# Altium PCB HESSO2L.PcbDoc
Units mm, origin at the board's own origin, x right, y up, seen from the top; angles counter-clockwise.
Board outline 80 x 100 mm, 2 copper layers (Top Layer, Bottom Layer), stack 1.57 mm thick; 39 components, 26 nets, 145 pads, 35 vias.
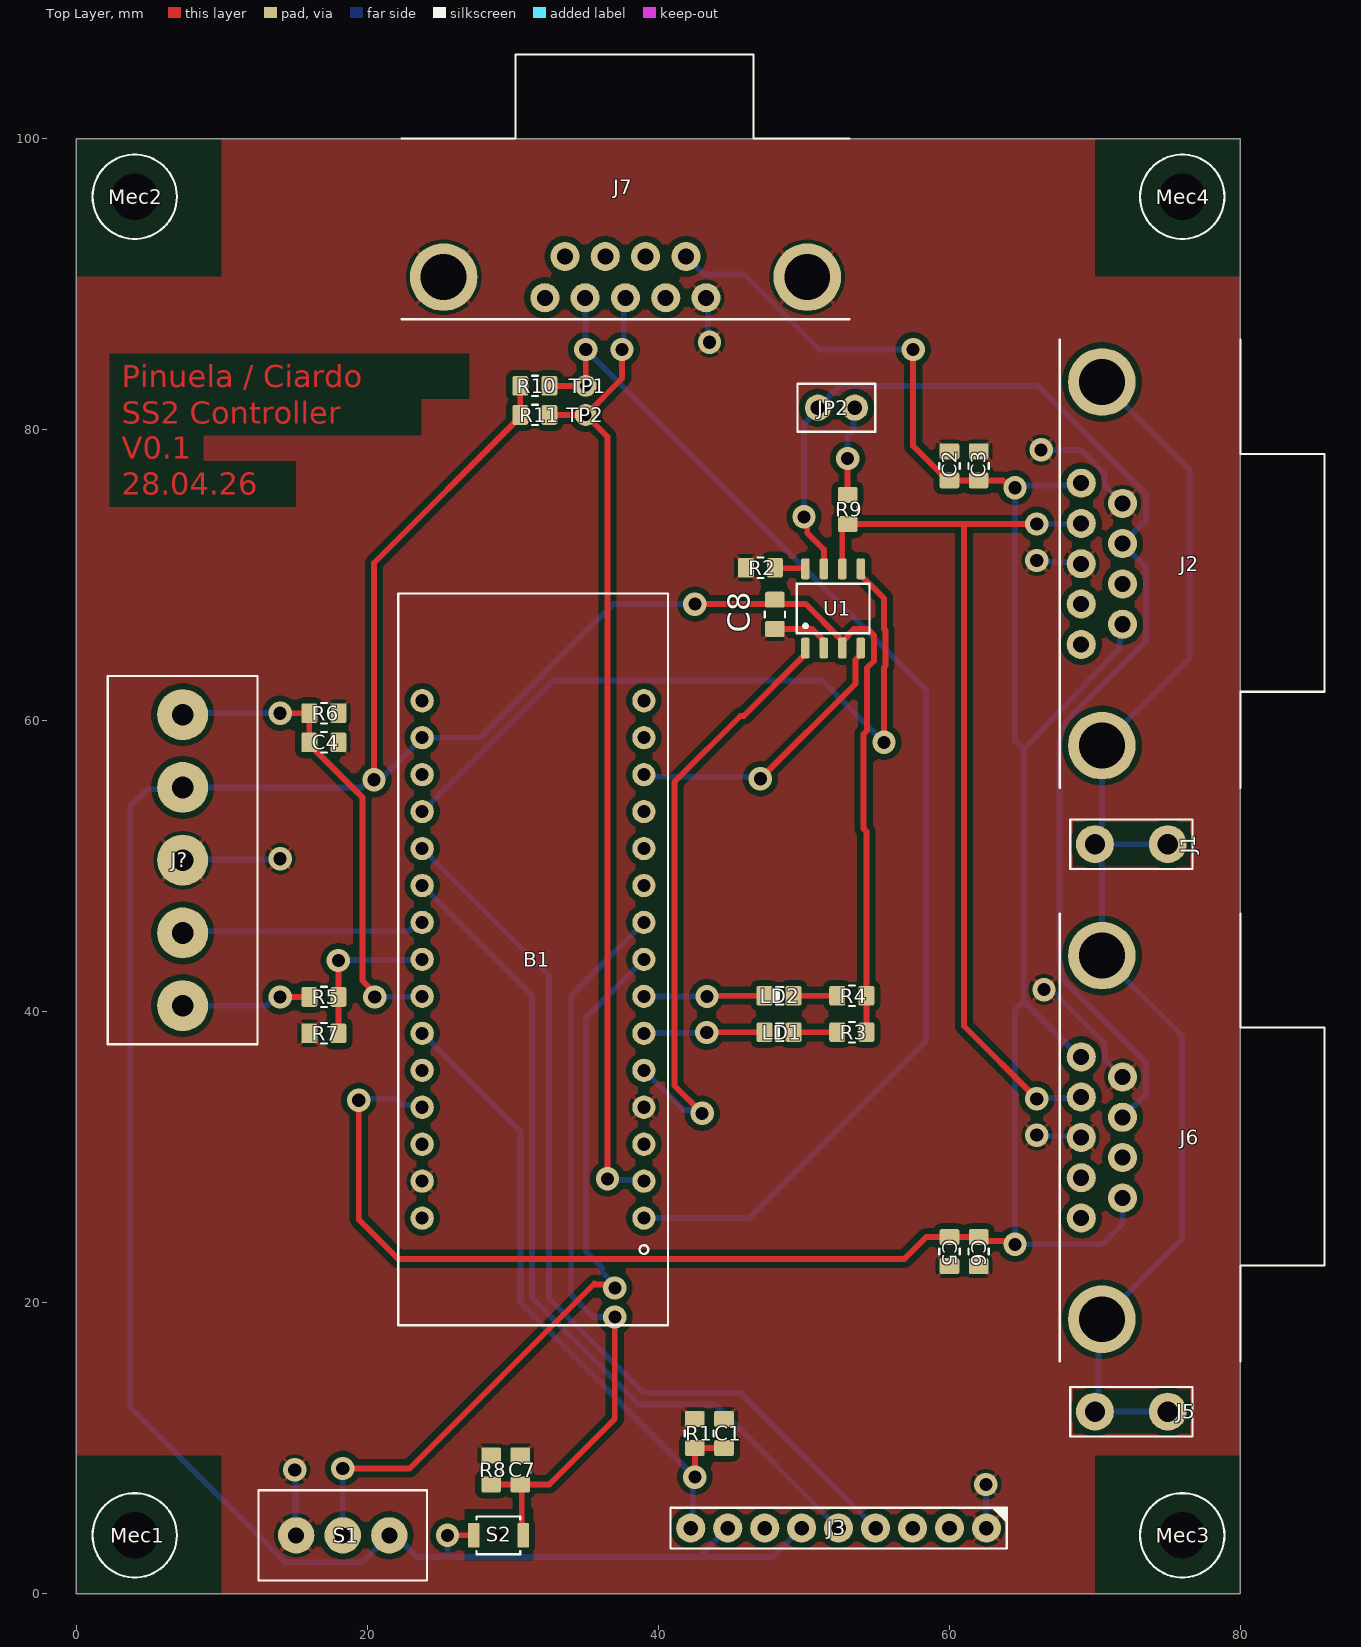
[diagram p0: Top Layer view]
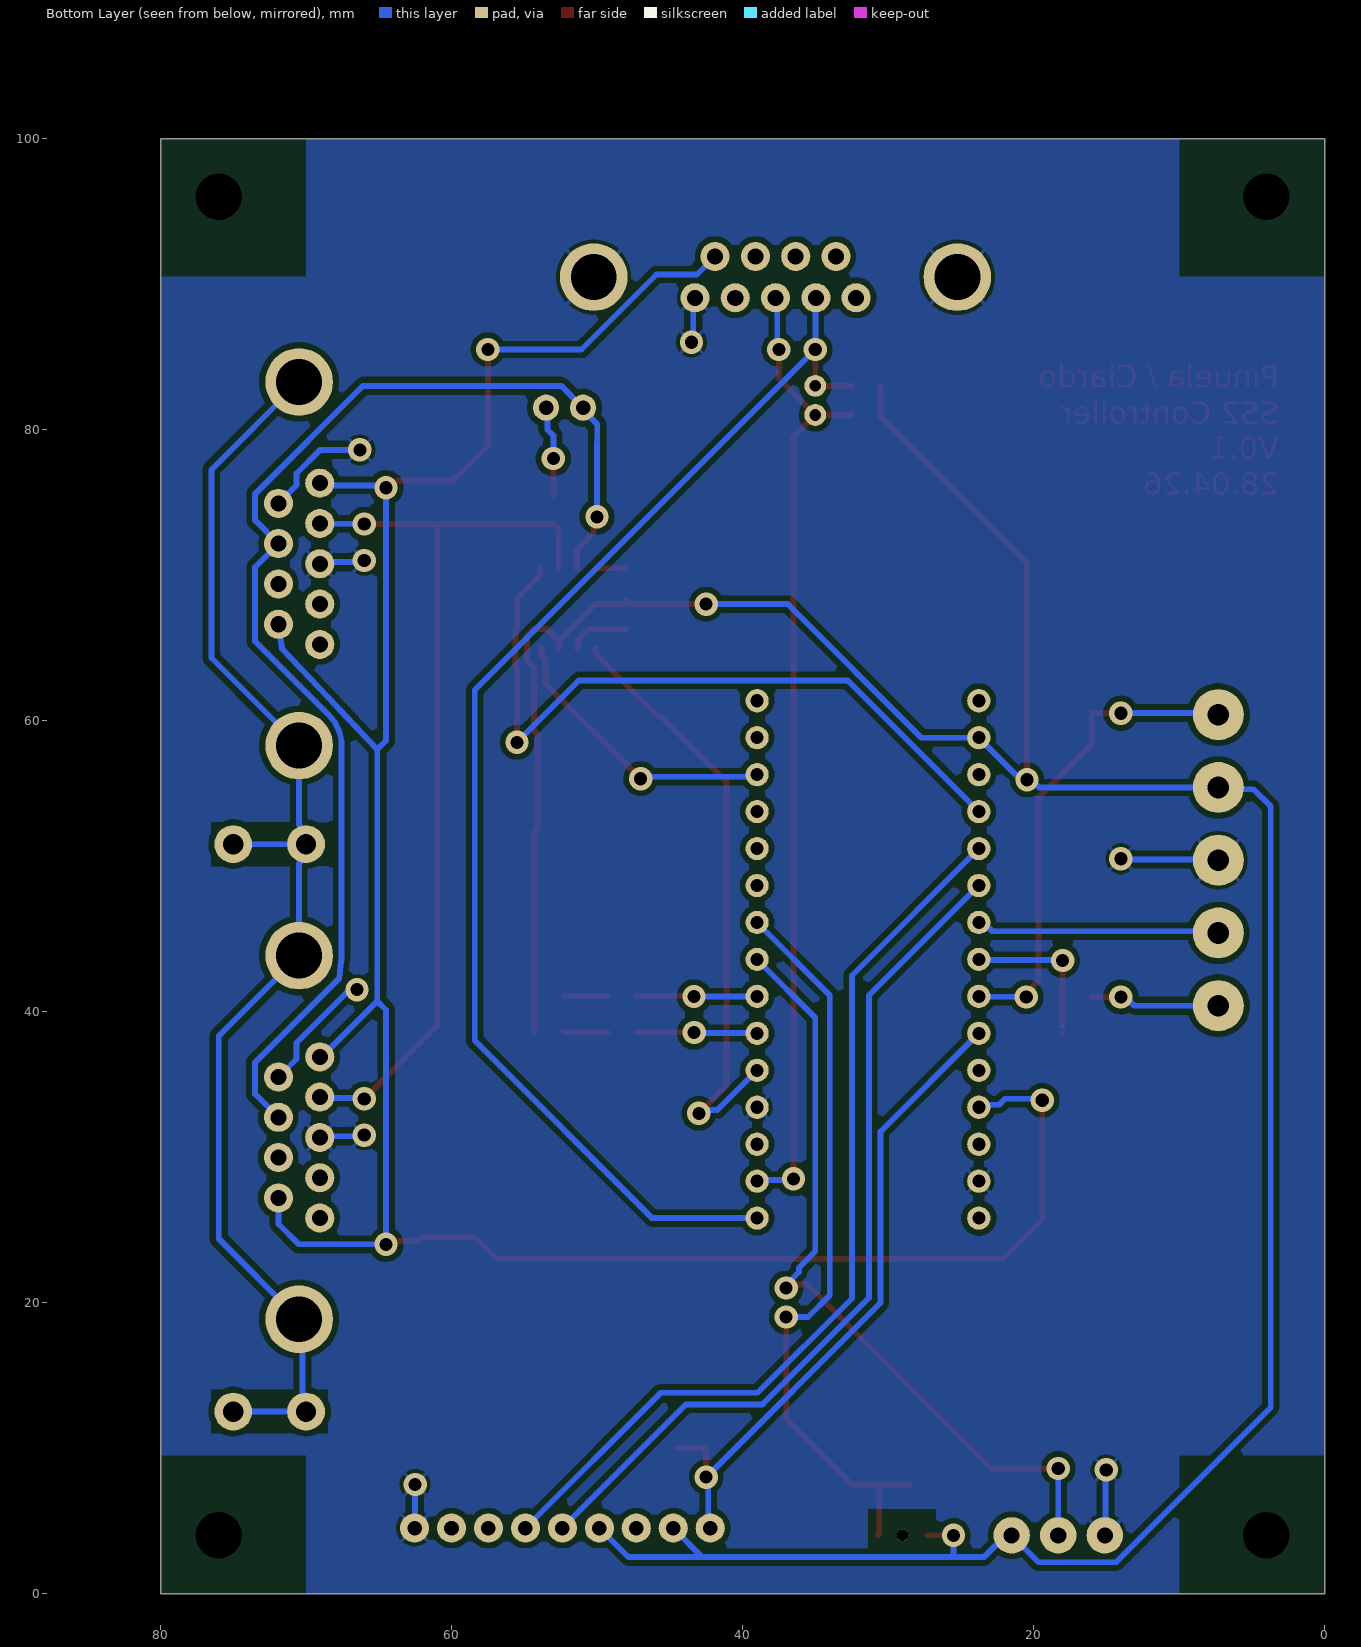
[diagram p1: Bottom Layer view, seen from below]
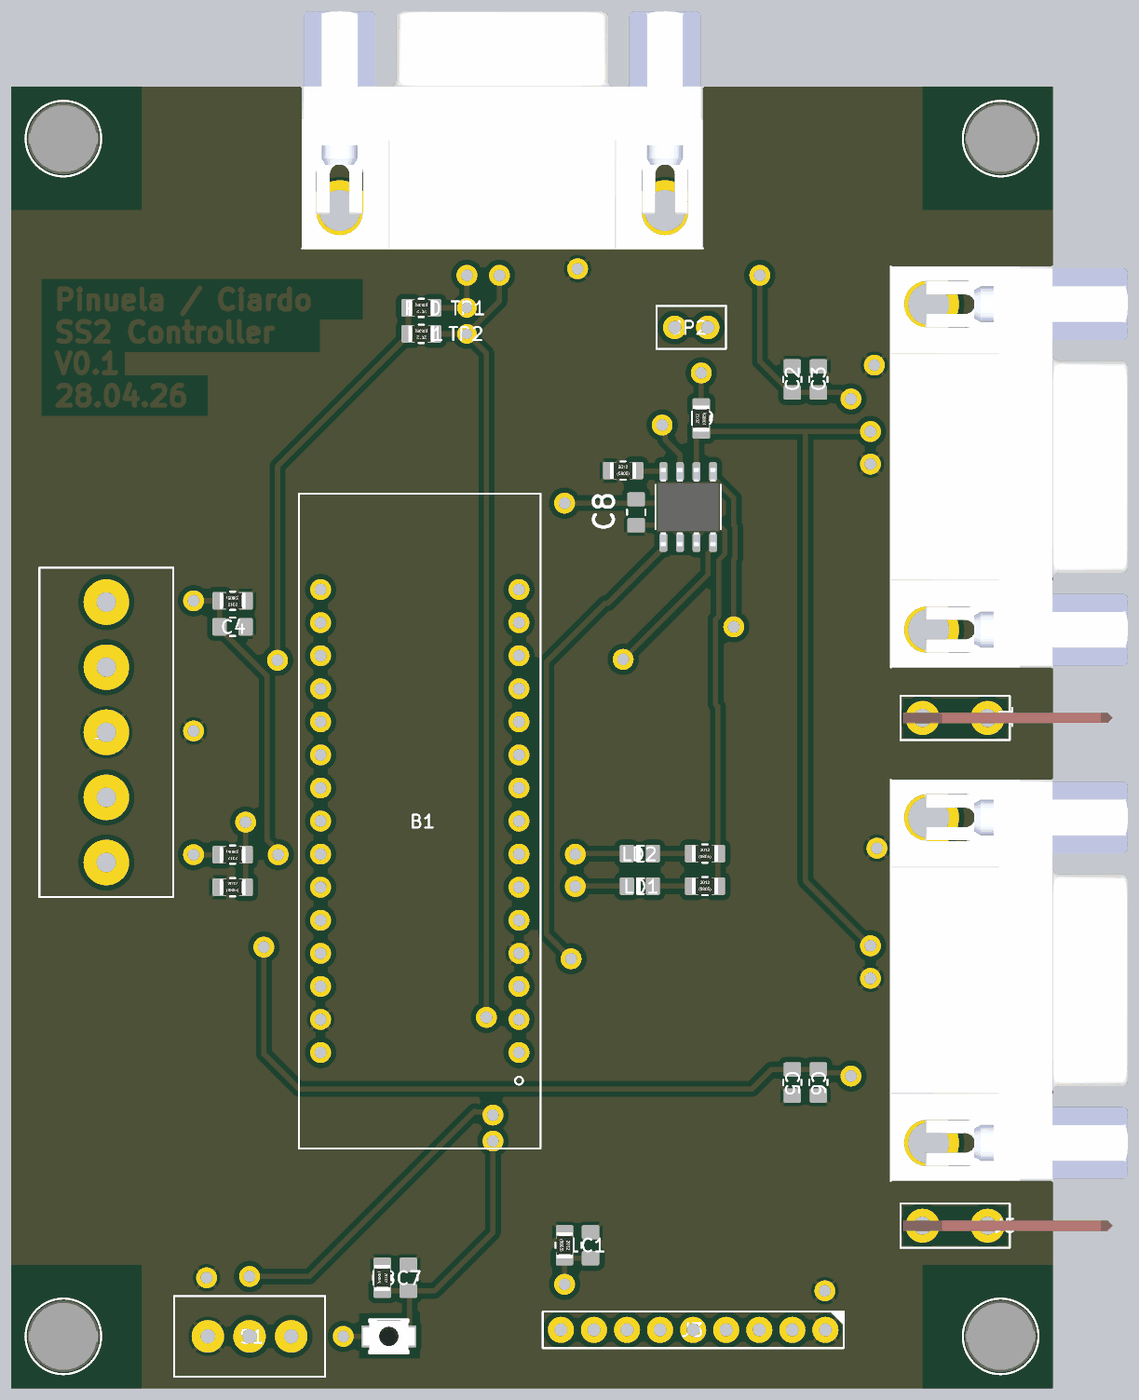
[diagram p2: 3D render of the assembled board from above, using the file's embedded part models]

## Layer stack, top to bottom
Top Layer: signal copper 0.035
Dielectric 1: core 1.5, FR-4, Dk 4.2
Bottom Layer: signal copper 0.035

## Board outline
0,0 80,0 80,100 0,100

## Design rules (kind name [scope] priority, off if disabled: settings)
AcuteAngle [All] p1 off: minimum=9.00000000000000E+0001 checktracksonly=TRUE
AssemblyTestPointUsage [All] p1 off:
AssemblyTestpoint [All] p1 off: testpointundercomponent=TRUE minsize=1.016 maxsize=2.54 preferedsize=1.524 minholesize=0 maxholesize=1.016 preferedholesize=0.813 testpointgrid=0.025 usegrid=TRUE gridtolerance=0 allowsidetop=TRUE allowsidebottom=TRUE
BoardOutlineClearance [All] p1 off: gap=0.25 ignorepadtopadclearanceinfootprint=FALSE
Clearance [All] p1: gap=0.4 ignorepadtopadclearanceinfootprint=FALSE except(0: Arc-Hole Track-Hole SMDPad-Hole THPad-Hole Via-Hole Fill-Hole Poly-Hole Region-Hole Text-Hole)
ComponentClearance [All] p1 off: gap=0.25 collisioncheckmode=3 verticalgap=0.25 showdistances=FALSE
DiffPairsRouting [All] p1 off: maxlimit=0.254 minlimit=0.254 mostfreqgap=0.254 toplayer_minwidth=0.381 toplayer_maxwidth=0.381 toplayer_prefwidth=0.381 bottomlayer_minwidth=0.381 bottomlayer_maxwidth=0.381 bottomlayer_prefwidth=0.381 maxuncoupledlength=12.7
FabricationTestPointUsage [All] p1 off: valid=0 allowmultiple=FALSE
FabricationTestpoint [All] p1 off: side=3 testpointundercomponent=TRUE minsize=1.016 maxsize=2.54 preferedsize=1.524 minholesize=0 maxholesize=1.016 preferedholesize=0.813 testpointgrid=0.025 allowsidetop=TRUE allowsidebottom=TRUE usegrid=TRUE gridtolerance=0
FanoutControl Fanout_BGA [IsBGA] p1 off: bgadir=Out bgaviamode=Centered fanoutstyle=Auto fanoutdirection=Alternating viagrid=0.025 // Fanout_BGA (Default Rule)
FanoutControl Fanout_LCC [IsLCC] p2 off: bgadir=Out bgaviamode=Centered fanoutstyle=Auto fanoutdirection=Alternating viagrid=0.025 // Fanout_LCC (Default Rule)
FanoutControl Fanout_SOIC [IsSOIC] p3 off: bgadir=Out bgaviamode=Centered fanoutstyle=Auto fanoutdirection=Alternating viagrid=0.025 // Fanout_SOIC (Default Rule)
FanoutControl Fanout_Small [(CompPinCount < 5)] p4 off: bgadir=Out bgaviamode=Centered fanoutstyle=Auto fanoutdirection=OutThenIn viagrid=0.025 // Fanout_Small (Default Rule)
FanoutControl Fanout_Default [All] p5 off: bgadir=Out bgaviamode=Centered fanoutstyle=Auto fanoutdirection=Alternating viagrid=0.025 // Fanout_Default (Default Rule)
Height [All] p1 off: minheight=0 maxheight=25.4 prefheight=12.7
HoleSize [All] p1 off: absolutevalues=TRUE maxlimit=3 minlimit=0.15 maxpercent=80.000 minpercent=20.000
HoleToHoleClearance [All] p1 off: gap=0.25 allowstackedmicrovias=TRUE
LayerPairs [All] p1 off: enforce=TRUE
MinimumAnnularRing [All] p1 off: minimumring=0.35
MinimumSolderMaskSliver [All] p1 off: minsoldermaskwidth=0
PasteMaskExpansion [All] p1 off: expansion=0
PlaneClearance [All] p1: clearance=0.25
PlaneConnect [All] p1 off: planeconnectstyle=Relief reliefexpansion=0.5 reliefentries=4 reliefconductorwidth=0.25 reliefairgap=0.25
PolygonConnect [All] p1: connectstyle=Relief reliefconductorwidth=0.25 reliefentries=4 polygonreliefangle="45 Angle" airgapwidth=0.25
RoutingCorners [All] p1 off: cornerstyle=45-Degree minsetback=2.5 maxsetback=2.5
RoutingLayers [All] p1 off: top layer_v5=TRUE bottom layer_v5=TRUE
RoutingPriority [All] p1 off: routingpriority=0
RoutingTopology [All] p1 off: topology=Shortest
RoutingVias [All] p1: holewidth=0.9 width=1.6 viastyle="Through Hole" minholewidth=0.9 minwidth=1.6 maxholewidth=1.9 maxwidth=1.6
SilkToBoardRegionClearance [All] p1 off:
SilkToSilkClearance [All] p1 off: silktosilkclearance=0
SilkToSolderMaskClearance [IsPad] p1 off: minsilkscreentomaskgap=0 clearancetoexposedcopper=TRUE
SolderMaskExpansion [All] p1 off: expansion=0 istentingtop=FALSE
Width [All] p1: maxlimit=4 minlimit=0.4 preferedwidth=0.4 minimp=50.000000 maximp=50.000000 favimp=50.000000
4 further rules are at their usual default settings.

## Components (designator, comment, footprint, x,y, rotation, side; value= is the part's Value field where it differs from the comment)
B1 "NUCLEO-L432KC Socket" "NUCLEO-L432KC Socket" 39,61.36 r180 top
C1 "10nF" "CAPACITOR 2012 REFLOW" 44.5,11 r270 top
C2 "10uF" "CAPACITOR 2012 REFLOW" 60,77.5 r270 top
C3 "100nF" "CAPACITOR 2012 REFLOW" 62,77.5 r270 top
C4 "10nF" "CAPACITOR 2012 REFLOW" 17,58.5 r180 top
C5 "10uF" "CAPACITOR 2012 REFLOW" 60,23.5 r90 top
C6 "100nF" "CAPACITOR 2012 REFLOW" 62,23.5 r90 top
C7 "10nF" "CAPACITOR 2012 REFLOW" 30.5,8.5 r270 top
C8 "100nF" "CAPACITOR 2012 REFLOW" 48,67.3 r90 top
J1 "3867B.68" "FASTON 6.3mm P5.0" 72.5,51.5 r180 top
J2 "*" "D-SUB 9 FEM RND 205-00769" 70.475,70.771 r0 top
J3 "*" "PinHeader1x9 P2.54" 52.38,4.5 r180 top
J5 "3867B.68" "FASTON 6.3mm P5.0" 72.5,12.5 r180 top
J6 "*" "D-SUB 9 FEM RND 205-00769" 70.475,31.345 r0 top
J7 "*" "D-SUB 9 FEM RND 205-00769" 37.729,90.475 r90 top
J? "*" "ScrewHeader5 P5.0" 7.3,50.4 r270 top
JP2 "{Value}" "JUMPER2 TH" 52.23,81.5 r180 top
LD1 "*" "LED 2012 REFLOW" 48.285,38.58 r0 top
LD2 "*" "LED 2012 REFLOW" 48.285,41.08 r0 top
Mec1 "*" "Screw M3X5 Unconnected" 4,4 r0 top
Mec2 "*" "Screw M3X5 Unconnected" 4,96 r0 top
Mec3 "*" "Screw M3X5 Unconnected" 76,4 r0 top
Mec4 "*" "Screw M3X5 Unconnected" 76,96 r0 top
R1 "100k" "RESISTOR 2012 REFLOW" 42.5,11 r270 top
R2 "TBD" "RESISTOR 2012 REFLOW" 47,70.5 r0 top
R3 "270" "RESISTOR 2012 REFLOW" 53.285,38.58 r0 top
R4 "270" "RESISTOR 2012 REFLOW" 53.285,41.08 r0 top
R5 "0" "RESISTOR 2012 REFLOW" 17,41 r180 top
R6 "100k" "RESISTOR 2012 REFLOW" 17,60.5 r180 top
R7 "NC" "RESISTOR 2012 REFLOW" 17,38.5 r0 top
R8 "100k" "RESISTOR 2012 REFLOW" 28.5,8.5 r270 top
R9 "120" "RESISTOR 2012 REFLOW" 53,74.5 r90 top
R10 "10k" "RESISTOR 2012 REFLOW" 31.5,83 r180 top
R11 "10k" "RESISTOR 2012 REFLOW" 31.5,81 r180 top
S1 "*" "SLIDE SWITCH Knitter MFP120" 18.3,4 r180 top
S2 "*" "Push Button C2.5X3.0 OMRON B3U-1000P(M)-B" 29,4 r0 top
TP1 "*" "Hole 0.8 D1.5" 35,83 r90 top
TP2 "*" "Hole 0.8 D1.5" 35,81 r180 top
U1 "MAX3051ESA" "SO8 P1.27 C4.0X5.0 H1.75" 52,67.7 r90 top

## Footprints (in the part's own frame and the unit in brackets; to place one, negate y for a bottom-side part, rotate by r counter-clockwise, add the part's x,y. Pads: shape width x height; smd on the part's side, far side on the other; paste and mask are expansions set on the pad)
"CAPACITOR 2012 REFLOW" [mm] "Capacitor SMD 2.0x1.2mm (0805-imperial)"
  rrect25% 1.1x1.35 smd: 1(-1,0) 2(1,0)
  silkscreen extent -0.2,-0.7 0.2,0.7, body extent -1,-0.6 1,0.6, height 1
"D-SUB 9 FEM RND 205-00769" [mm] "RND 205-00769"
  round 2 hole 1.1: 1(-1.42,5.54) 2(-1.42,2.77) 3(-1.42,0) 4(-1.42,-2.77) 5(-1.42,-5.54) 6(1.42,4.155) 7(1.42,1.385) 8(1.42,-1.385) 9(1.42,-4.155)
  round 4.65 hole 3.15: 10(0,12.495) 11(0,-12.495)
  silkscreen extent -2.9,-15.4 15.3,15.4, body extent -2.9,-15.39 15.3,15.41, height 12.69
"FASTON 6.3mm P5.0" [mm] "Faston Vogt 3867B.68 6.3mm P5.0"
  round 2.6 hole 1.4: 1(-2.5,0) 1(2.5,0)
  silkscreen extent -4.2,-1.7 4.2,1.7, body extent -12.1,-0.4 4,0.4, height 9
"Hole 0.8 D1.5" [mm] "Test Point Hole 0.8 Pad diameter 1.5"
  round 1.5 hole 0.8: 1(0,0)
"JUMPER2 TH" [mm] "JUMPER2 TH"
  round 1.8 hole 1 paste-2539.97: 1(-1.27,0) 2(1.27,0)
  silkscreen extent -2.67,-1.65 2.67,1.65, body extent -2.61,-1.6 2.61,1.6, height 8.5
"LED 2012 REFLOW" [mm] "LED SMD 2.0x1.2mm (0805-imperial)"
  rrect25% 1.1x1.35 smd: 1(-1,0) 2(1,0)
  silkscreen extent -0.2,-0.6 0.3,0.6, body extent -1,-0.6 1,0.6, height 0.6
"NUCLEO-L432KC Socket" [mm] "ARM Cortex based board"
  round 1.6 hole 0.9: 1(0,35.56) 2(0,33.02) 3(0,30.48) 4(0,27.94) 5(0,25.4) 6(0,22.86) 7(0,20.32) 8(0,17.78) 9(0,15.24) 10(0,12.7) 11(0,10.16) 12(0,7.62) 13(0,5.08) 14(0,2.54) 15(0,0) 16(15.24,0) 17(15.24,2.54) 18(15.24,5.08) 19(15.24,7.62) 20(15.24,10.16) 21(15.24,12.7) 22(15.24,15.24) 23(15.24,17.78) 24(15.24,20.32) 25(15.24,22.86) 26(15.24,25.4) 27(15.24,27.94) 28(15.24,30.48) 29(15.24,33.02) 30(15.24,35.56)
  silkscreen extent -1.65,-7.37 16.89,42.93, body extent -1.27,-1.27 16.51,36.83, height 7.01
"PinHeader1x9 P2.54" [mm] "Plug connector"
  round 2 hole 1: 1(-10.16,0) 2(-7.62,0) 3(-5.08,0) 4(-2.54,0) 5(0,0) 6(2.54,0) 7(5.08,0) 8(7.62,0) 9(10.16,0)
  silkscreen extent -11.56,-1.4 11.56,1.4, body extent -11.43,-1.27 11.43,1.27, height 8.5
"Push Button C2.5X3.0 OMRON B3U-1000P(M)-B" [mm] "Push Button C2.5X3.0 OMRON B3U-1000P(M)-B"
  rrect25% 0.8x1.7 smd: 1(-1.7,0) 2(1.7,0)
  round 0.8 hole 0.8 unplated: ""(0,0)
  silkscreen extent -1.5,-1.3 1.5,1.3, body extent -2,-1.25 2,1.25, height 1.61
"RESISTOR 2012 REFLOW" [mm] "Resistor SMD 2.0x1.2mm (0805-imperial)"
  rrect25% 1.1x1.35 smd: 1(-1,0) 2(1,0)
  silkscreen extent -0.2,-0.7 0.2,0.7, body extent -1,-0.63 1,0.63, height 0.45
"Screw M3X5 Unconnected" [mm] "Standard Screw M3X5 Unconnected BN330"
  round 0 hole 3.2 paste-2539.97 mask+0: 0(0,0)
  silkscreen extent -2.9,-2.9 2.9,2.9, body extent -2.75,-2.75 2.75,2.75, height 2.02
"ScrewHeader5 P5.0" [mm] "PCB terminal block with screw"
  round 3.5 hole 1.5: 1(-10,0) 2(-5,0) 3(0,0) 4(5,0) 5(10,0)
  silkscreen extent -12.65,-5.15 12.65,5.15, body extent -12.58,-5.1 12.5,5.07, height 14.1
"SLIDE SWITCH Knitter MFP120" [mm] "Slide Switch Knitter-Switch type MFP120"
  round 2.5 hole 1.1: 1(-3.2,0) 2(0,0) 3(3.2,0)
  silkscreen extent -5.8,-3.1 5.8,3.1, body extent -5.5,-2.8 5.5,2.8, height 10
"SO8 P1.27 C4.0X5.0 H1.75" [mm] "8-Pin Small Outline Integrated Circuit 1.27 mm Pitch, IPC Medium Density"
  rrect50% 1.45x0.6 smd: 1(-2.725,1.905) 2(-2.725,0.635) 3(-2.725,-0.635) 4(-2.725,-1.905) 5(2.725,-1.905) 6(2.725,-0.635) 7(2.725,0.635) 8(2.725,1.905)
  silkscreen extent -1.7,-2.5 1.7,2.5, body extent -3,-2.45 3,2.45, height 1.75

## Part data
B1: "ARM Cortex based board"
C1 C2 C3 C4 C5 C6 C7 C8: library part Capacitor, "Capacitor"
J1 J5: library part "FASTON 6.3mm P5.0", "Faston Right angle Vogt 3867B.68"
J2 J6 J7: library part "D-SUB 9 FEM GROUNDED", "D-Subminiature 9 way Socket Right Angle"
J3: library part PinHeader1x9, "Plug connector"
J?: library part Header5, "PCB terminal block"
JP2: library part "JUMPER 2 POS", "JUMPER 2 POS"
LD1 LD2: library part LED, "LED generic"
Mec1 Mec2 Mec3 Mec4: library part "Screw Unconnected", "Screw Unconnected BN330"
R1 R2 R3 R4 R5 R6 R7 R8 R9 R10 R11: library part Resistor, "Resistor"
S1: library part "Slide Switch 1Pole ON-ON", "Slide Switch 1Pole ON-ON"
S2: library part "Push Button 2Pins", "Push Button, 2 pins"
TP1 TP2: library part Hole, "Hole"
U1: "+3.3V, 1Mbps, Low-Supply-Current CAN Transceiver"

## Via types
v1: diameter 1.6, hole 0.9, Top Layer to Bottom Layer, 35 vias

## Nets (pads, with @x,y where several pads share a name; then routed paths per layer and width w, separated by ;. In a path a pad name is that pad's centre, name@x,y a point inside that pad or via, vN(x,y) a via of type N, cw(c..) or ccw(c..) an arc to the next point about the centre after c; other vN are vias at no path point)
+3V3: B1.17 C8.2 J3.6 J3.8 J?.2 R3.2 R4.2 R10.2 R11.2 S1.1 S2.1 U1.3 | length 218.8
  Top Layer w0.4: v1(20.449,55.93) 20.449,70.824 30.5,80.875 R11.2 R10.2 ; v1(25.5,4) S2.1 ; v1(42.5,68) 47.7,68 C8.2 ; C8.2@48,68 50.126,68 52.535,65.591 U1.3@52.535,65.4 ; U1.3 52.635,65.4 53.005,65.77 53.005,65.861 53.444,66.3 54.366,66.3 54.805,65.861 54.805,64.089 54.335,63.619 54.335,59.315 54.1,59.08 54.1,52.563 54.285,52.377 R4.2 R3.2
  Bottom Layer w0.4: v1(25.5,4) 25.5,2.5 ; v1(42.5,68) 36.889,68 27.709,58.82 B1.17 20.461,55.521 20.461,55.917 v1(20.449,55.93) 20.144,55.93 19.614,55.4 J?.2 7.179,55.279 4.879,55.279 3.7,54.1 3.7,12.784 14.334,2.15 19.65,2.15 S1.1 21.916,4 23.416,2.5 25.5,2.5 ; J3.8 42.76,2.5 ; J3.6 47.84,2.5 42.76,2.5 ; 25.5,2.5 42.76,2.5
+5: B1.27 C2.2 C3.2 C5.2 C6.2 J2.1 J2.9 J6.1 J6.9 J7.9 | length 177.2
  Top Layer w0.4: v1@19.35,33.85 v1(19.4,33.9) 19.4,25.7 22.1,23 56.9,23 58.4,24.5 C5.2 C6.2 62.27,24.23 64.27,24.23 v1(64.5,24) ; v1(57.5,85.5) 57.5,78.875 59.875,76.5 C2.2 C3.2 63.675,76.5 64.175,76 v1(64.5,76) ; J2.1@68.622,76.311 J2.1
  Bottom Layer w0.4: v1(19.4,33.9) 19.5,34 21.955,34 22.36,33.595 23.585,33.595 B1.27 ; J7.9 43.124,90.655 45.907,90.655 51.062,85.5 v1(57.5,85.5) ; J6.1 68.925,36.885 65.1,40.71 ; J2.1 68.899,76.155 64.655,76.155 v1(64.5,76) 64.5,58.617 65.1,58.017 ; J6.9 71.895,25.395 70.5,24 v1(64.5,24) 64.5,40.11 65.1,40.71 ; J2.9 71.653,64.931 67.861,60.93 67.858,60.927 ccw(c70.475,58.276) 67.685,60.744 65.1,58.017 ; 65.1,40.71 65.1,40.92 65.1,58.017
C_AXEX: B1.21 J3.5 | length 59.1
  Bottom Layer w0.4: B1.21 31.316,41.104 31.316,20.316 38.631,13 43.88,13 J3.5
C_AXEY: B1.20 J3.4 | length 63.5
  Bottom Layer w0.4: B1.20 32.481,42.479 32.481,20.281 38.963,13.8 45.62,13.8 J3.4
C_CAN1_RX: B1.13 U1.4 | length 20
  Top Layer w0.4: v1(47,56) 53.535,62.535 53.535,64.18 53.805,64.45 53.805,64.875 U1.4
  Bottom Layer w0.4: B1.13 39.14,56.14 46.86,56.14 v1(47,56)
C_CAN1_TX: B1.5 U1.1 | length 41.8
  Top Layer w0.4: v1(43,33) 41.1,34.9 41.1,55.783 45.633,60.317 45.862,60.317 50.095,64.55 U1.1
  Bottom Layer w0.4: B1.5 41.73,33.23 42.77,33.23 v1(43,33)
C_DAC1: B1.22 J?.4 | length 16.7
  Bottom Layer w0.4: J?.4@7.3,45.521 22.836,45.521 23.435,46.12 B1.22
C_External_Analog_Input: B1.23 R5.1 R7.2 | length 10.3
  Top Layer w0.4: R7.2@18,39 R5.1 v1(18,43.5)
  Bottom Layer w0.4: v1(18,43.5) 18.04,43.54 23.72,43.54 B1.23
CANH: J2.7 J6.7 JP2.2 U1.7 | length 87.9
  Top Layer w0.4: v1(50,74) 50.23,73.77 50.23,72.885 51.365,71.75 U1.7
  Bottom Layer w0.4: v1(50,74) 49.992,74.008 49.992,79.099 49.984,79.107 49.984,80.355 50.96,81.331 JP2.2 52.46,83 66.084,83 73.495,75.589 73.495,73.756 J2.7 73.495,70.556 73.495,65.433 68.424,60.361 cw(c67.858,60.927) 68.422,60.359 ccw(c70.475,58.276) 67.55,58.276 67.55,43.84 ccw(c70.475,43.84) 67.639,43.126 67.709,42.291 67.813,42.187 73.495,36.505 73.495,34.33 J6.7
CANL: J2.2 J6.2 R9.1 U1.6 | length 64
  Top Layer w0.4: U1.6 52.635,73.15 52.985,73.5 R9.1 61,73.5 ; v1(66,34) 61,39 61,73.5 ; v1(66,73.5) 61,73.5
  Bottom Layer w0.4: v1(66,34) 66.058,34.058 68.997,34.058 J6.2 ; v1(66,73.5) 66.02,73.52 69.034,73.52 J2.2
EARTH: J1.1 J2.10 J2.11 J5.1 J6.10 J6.11 | length 90.9
  Bottom Layer w0.4: J2.10 76.5,77.241 76.5,64.301 J2.11 70.475,52.834 70.421,52.78 70.421,51.921 J1.1@70,51.5 ; J5.1@75,12.5 70,12.5 70.237,12.737 70.237,18.613 J6.11 76,24.375 76,38.315 J6.10 70.475,50.166 70.421,50.22 70.421,51.079 J1.1@70,51.5 ; J1.1@75,51.5 J1.1@70,51.5
EXTERNAL_BUTTON: B1.24 C4.2 J?.1 R6.2 | length 33.9
  Top Layer w0.4: v1(14,60.5) R6.2 C4.2 16,58.375 19.649,54.726 19.649,42.129 20.5,41.277 v1(20.5,41)
  Bottom Layer w0.4: J?.1@6.724,60.521 7.3,60.521 7.311,60.511 13.989,60.511 v1(14,60.5) ; v1(20.5,41) 20.52,41.02 23.74,41.02 B1.24
GND: B1.4 B1.29 C1.1 C2.1 C3.1 C4.1 C5.1 C6.1 C7.1 C8.1 J2.3 J2.6 J3.1 J6.3 J6.6 J7.5 J7.10 J7.11 J?.3 R1.1 R2.1 R6.1 R7.1 R8.1 S1.3 U1.2 | length 44.1
  Top Layer w0.4: C8.1 50.556,66.3 51.265,65.591 51.265,65.075 U1.2
  Bottom Layer w0.4: J?.3 7.35,50.45 13.95,50.45 v1(14,50.5) ; v1(15,8.5) 15.05,8.45 15.05,4.05 S1.3 ; J7.5 43.384,88.939 43.384,86.116 v1(43.5,86) ; v1(62.5,7.5) 62.52,7.48 62.52,4.52 J3.1 ; v1(66,31.5) 66.078,31.423 68.977,31.423 J6.3 ; v1(66,71) 66.115,70.885 68.94,70.885 J2.3 ; v1(66.3,78.6) 69.029,78.6 70.655,76.974 70.655,76.166 J2.6 ; v1(66.5,41.5) 66.73,41.27 67.23,41.27 70.655,37.845 70.655,36.74 J6.6
Joystick_Button: B1.25 C1.2 J3.9 R1.2 | length 46.1
  Top Layer w0.4: J3.9 J3.9@42.36,4.64 ; v1(42.5,8) R1.2 C1.2
  Bottom Layer w0.4: B1.25 30.516,31.744 30.516,19.984 v1(42.5,8) 42.36,7.86 42.36,4.64 J3.9
LED1: B1.6 LD1.1 | length 8.3
  Top Layer w0.4: B1.6 B1.6@39.013,38.513 ; v1(43.32,38.556) 43.345,38.58 LD1.1
  Bottom Layer w0.4: B1.6 39.028,38.528 43.293,38.528 v1(43.32,38.556)
LED2: B1.7 LD2.1 | length 8.3
  Top Layer w0.4: B1.7 B1.7@39.007,41.033 ; v1(43.327,41.031) 43.377,41.08 LD2.1
  Bottom Layer w0.4: B1.7 39.005,41.035 43.323,41.035 v1(43.327,41.031)
NetJ?_5: J?.5 R5.2 | length 8.9
  Top Layer w0.4: v1(14,41) R5.2
  Bottom Layer w0.4: J?.5 13.075,40.4 13.675,41 v1(14,41)
NetJP2_1: JP2.1 R9.2 | length 6.2
  Top Layer w0.4: R9.2 v1(53,78)
  Bottom Layer w0.4: v1(53,78) 53,79.588 53.412,80 53.412,81.412 JP2.1
NetLD1_2: LD1.2 R3.1 | length 3
  Top Layer w0.4: LD1.2 R3.1 R3.1@52.273,38.593
NetLD2_2: LD2.2 R4.1 | length 3
  Top Layer w0.4: LD2.2 R4.1
NetR2_2: R2.2 U1.8 | length 2.1
  Top Layer w0.4: R2.2 48.038,70.462 50.058,70.462 U1.8
PUSHBUTTON: B1.9 C7.2 R8.2 S2.2 | length 52.3
  Top Layer w0.4: R8.2 C7.2 ; S2.2 30.6,4.1 30.6,7.4 C7.2 ; v1(37,19) 37,12 32.5,7.5 C7.2
  Bottom Layer w0.4: v1(37,19) 35.5,19 34,20.5 34,41.12 B1.9
SCL: B1.1 J7.2 R10.1 TP1.1 | length 90.2
  Top Layer w0.4: R10.1 TP1.1 v1(35,85.5)
  Bottom Layer w0.4: J7.2 34.98,89.034 34.98,85.52 v1(35,85.5) 58.4,62.1 58.4,38 46.2,25.8 B1.1
SDA: B1.2 J7.3 R11.1 TP2.1 | length 67.4
  Top Layer w0.4: R11.1 TP2.1 ; v1(36.5,28.5) 36.5,79.5 TP2.1 ; v1(37.5,85.5) 37.5,83.5 TP2.1
  Bottom Layer w0.4: v1(36.5,28.5) 36.58,28.42 38.92,28.42 B1.2 ; v1(37.5,85.5) 37.615,85.614 37.615,88.94 J7.3
SHDN_MAX3051: B1.19 U1.5 | length 49.9
  Top Layer w0.4: U1.5 53.905,70 55.5,68.405 55.5,66.297 55.605,66.192 55.605,63.758 55.5,63.653 v1(55.5,58.5)
  Bottom Layer w0.4: B1.19 32.78,62.76 51.24,62.76 v1(55.5,58.5)
SLIDER: B1.8 S1.2 | length 53.8
  Top Layer w0.4: v1(18.3,8.6) 22.9,8.6 35.6,21.3 35.67,21.23 36.77,21.23 v1(37,21)
  Bottom Layer w0.4: S1.2 v1(18.3,8.6) ; v1(37,21) 37,21.217 36.119,22.099 36.119,22.381 35,23.5 35,39.58 B1.8
pads on no net: B1.3 B1.10 B1.11 B1.12 B1.14 B1.15 B1.16 B1.18 B1.26 B1.28 B1.30 J2.4 J2.5 J2.8 J3.2 J3.3 J3.7 J6.4 J6.5 J6.8 J7.1 J7.4 J7.6 J7.7 J7.8 Mec1.0 Mec2.0 Mec3.0 Mec4.0 S2.

## Polygon pours and split planes (outlines as drawn)
GND on Top Layer "GND_L01_P001" (solid, pour order 1): 0,100 80,100 80,0 0,0
GND on Bottom Layer "GND_L02_P000" (solid, pour order 0): 0,100 80,100 80,0 0,0

## Other copper
Top Layer:
  text "Pinuela / Ciardo" at 3.1,82.9 h1.52
  text "SS2 Controller" at 3.1,80.4 h1.52
  text "V0.1" at 3.1,78 h1.52
  text "28.04.26" at 3.1,75.5 h1.52
Multi-Layer:
  pour cut-out: 68.5,53 76.5,53 76.5,50 68.5,50
  pour cut-out: 26.7,5.777 31.4,5.82 31.4,2.3 26.7,2.3
  pour cut-out: 0,9.5 10,9.5 10,0 0,0
  pour cut-out: 70,9.5 80,9.5 80,0 70,0
  pour cut-out: 68.5,14 76.5,14 76.5,11 68.5,11
  pour cut-out: 0,100 10,100 10,90.5 0,90.5
  pour cut-out: 70,100 80,100 80,90.5 70,90.5
  pour cut-out: 67,-90.5 77,-90.5 77,-100 67,-100

## Silkscreen, mask and mechanical layers (free items; w line width, h text height)
Mechanical 1:
  the board outline again, w0.15
Drill Drawing:
  circle w0.254: c2.256,117.1 r0.847
  lines w0.254: 1.409,112.867 1.833,112.867 1.833,112.443 2.679,112.443 2.679,112.867 3.103,112.867 3.103,113.713 2.679,113.713 2.679,114.137 1.833,114.137 1.833,113.713 1.409,113.713 1.409,112.867 ; 1.409,120.487 1.833,120.487 2.256,120.063 2.679,120.487 3.103,120.487 2.679,120.91 3.103,121.333 2.679,121.333 2.256,121.757 1.833,121.333 1.409,121.333 1.833,120.91 1.409,120.487 ; 1.409,125.567 3.103,125.567 2.256,123.873 1.409,125.567 ; 1.409,127.683 2.256,128.107 3.103,127.683 2.679,128.53 3.103,129.377 2.256,128.953 1.409,129.377 1.833,128.53 1.409,127.683 ; 1.409,131.493 3.103,131.493 3.103,133.187 1.409,133.187 1.409,131.493 ; 1.409,135.303 3.103,135.303 3.103,136.997 1.409,136.997 1.409,135.303 ; 1.409,139.96 2.256,139.113 3.103,139.96 2.256,140.807 1.409,139.96 ; 1.409,142.923 1.409,143.347 1.833,143.77 1.409,144.193 1.409,144.617 1.833,144.617 2.256,144.193 2.679,144.617 3.103,144.617 3.103,144.193 2.679,143.77 3.103,143.347 3.103,142.923 2.679,142.923 2.256,143.347 1.833,142.923 1.409,142.923 ; 1.748,131.832 2.764,131.832 2.764,132.848 1.748,132.848 1.748,131.832
  lines w0.381: -0.109,111.3 270.935,111.3 ; -0.109,145.59 270.935,145.59 ; 13.883,107.49 13.883,149.4 ; 28.865,107.49 28.865,149.4 ; 58.066,107.49 58.066,149.4 ; 70.915,107.49 70.915,149.4 ; 89.554,107.49 89.554,149.4 ; 127.643,107.49 127.643,149.4 ; 142.625,107.49 142.625,149.4 ; 161.568,107.49 161.568,149.4 ; 180.359,107.49 180.359,149.4 ; 202.044,107.49 202.044,149.4 ; 235.918,107.49 235.918,149.4 ; -0.109,107.49 270.935,107.49 270.935,149.4 -0.109,149.4 -0.109,107.49
  text "Symbol" at 2.177,146.733 h1.83
  text "Count" at 15.026,146.733 h1.83
  text "Hole Size" at 30.008,146.733 h1.83
  text "Plated" at 59.209,146.733 h1.83
  text "Hole Type" at 72.058,146.733 h1.83
  text "Drill Layer Pair" at 90.697,146.733 h1.83
  text "Via/Pad" at 128.786,146.733 h1.83
  text "Pad Shape" at 143.768,146.733 h1.83
  text "Template" at 162.711,146.733 h1.83
  text "Description" at 181.502,146.733 h1.83
  text "Hole Tolerance (+)" at 203.187,146.733 h1.83
  text "Hole Tolerance (-)" at 237.061,146.733 h1.83
  text "1" at 15.026,142.923 h1.52
  text "0.800mm (31.50mil)" at 30.008,142.923 h1.52
  text "NPTH" at 59.209,142.923 h1.52
  text "Round" at 72.058,142.923 h1.52
  text "Top Layer - Bottom Layer" at 90.697,142.923 h1.52
  text "Pad" at 128.786,142.923 h1.52
  text "Rounded" at 143.768,142.923 h1.52
  text "c80hn80" at 162.711,142.923 h1.52
  text "2" at 15.026,139.113 h1.52
  text "0.800mm (31.50mil)" at 30.008,139.113 h1.52
  text "PTH" at 59.209,139.113 h1.52
  text "Round" at 72.058,139.113 h1.52
  text "Top Layer - Bottom Layer" at 90.697,139.113 h1.52
  text "Pad" at 128.786,139.113 h1.52
  text "Rounded" at 143.768,139.113 h1.52
  text "c150h80" at 162.711,139.113 h1.52
  text "4" at 15.026,135.303 h1.52
  text "1.400mm (55.12mil)" at 30.008,135.303 h1.52
  text "PTH" at 59.209,135.303 h1.52
  text "Round" at 72.058,135.303 h1.52
  text "Top Layer - Bottom Layer" at 90.697,135.303 h1.52
  text "Pad" at 128.786,135.303 h1.52
  text "Rounded" at 143.768,135.303 h1.52
  text "c260h140" at 162.711,135.303 h1.52
  text "4" at 15.026,131.493 h1.52
  text "3.200mm (125.98mil)" at 30.008,131.493 h1.52
  text "PTH" at 59.209,131.493 h1.52
  text "Round" at 72.058,131.493 h1.52
  text "Top Layer - Bottom Layer" at 90.697,131.493 h1.52
  text "Pad" at 128.786,131.493 h1.52
  text "Rounded" at 143.768,131.493 h1.52
  text "c0h320m-1p0" at 162.711,131.493 h1.52
  text "5" at 15.026,127.683 h1.52
  text "1.500mm (59.06mil)" at 30.008,127.683 h1.52
  text "PTH" at 59.209,127.683 h1.52
  text "Round" at 72.058,127.683 h1.52
  text "Top Layer - Bottom Layer" at 90.697,127.683 h1.52
  text "Pad" at 128.786,127.683 h1.52
  text "Rounded" at 143.768,127.683 h1.52
  text "c350h150" at 162.711,127.683 h1.52
  text "6" at 15.026,123.873 h1.52
  text "3.150mm (124.02mil)" at 30.008,123.873 h1.52
  text "PTH" at 59.209,123.873 h1.52
  text "Round" at 72.058,123.873 h1.52
  text "Top Layer - Bottom Layer" at 90.697,123.873 h1.52
  text "Pad" at 128.786,123.873 h1.52
  text "Rounded" at 143.768,123.873 h1.52
  text "c465h315" at 162.711,123.873 h1.52
  text "11" at 15.026,120.063 h1.52
  text "1.000mm (39.37mil)" at 30.008,120.063 h1.52
  text "PTH" at 59.209,120.063 h1.52
  text "Round" at 72.058,120.063 h1.52
  text "Top Layer - Bottom Layer" at 90.697,120.063 h1.52
  text "Pad" at 128.786,120.063 h1.52
  text "Rounded" at 143.768,120.063 h1.52
  text "(Mixed)" at 162.711,120.063 h1.52
  text "30" at 15.026,116.253 h1.52
  text "1.100mm (43.31mil)" at 30.008,116.253 h1.52
  text "PTH" at 59.209,116.253 h1.52
  text "Round" at 72.058,116.253 h1.52
  text "Top Layer - Bottom Layer" at 90.697,116.253 h1.52
  text "Pad" at 128.786,116.253 h1.52
  text "Rounded" at 143.768,116.253 h1.52
  text "(Mixed)" at 162.711,116.253 h1.52
  text "65" at 15.026,112.443 h1.52
  text "0.900mm (35.43mil)" at 30.008,112.443 h1.52
  text "PTH" at 59.209,112.443 h1.52
  text "Round" at 72.058,112.443 h1.52
  text "Top Layer - Bottom Layer" at 90.697,112.443 h1.52
  text "(Mixed)" at 128.786,112.443 h1.52
  text "Rounded" at 143.768,112.443 h1.52
  text "(Mixed)" at 162.711,112.443 h1.52
  text "128 Total" at 15.026,108.633 h1.52